# Altium PCB Kasli_BP_Adapter.PCBDOC (part 3 of 3)
Units mm, origin at the board's own origin, x right, y up, seen from the top; angles counter-clockwise.
Board outline 52.2 x 100 mm, 4 copper layers (TopLayer, MP(G), MidLayer1, BottomLayer), stack 1.65 mm thick; 18 components, 82 nets, 256 pads, 42 vias.
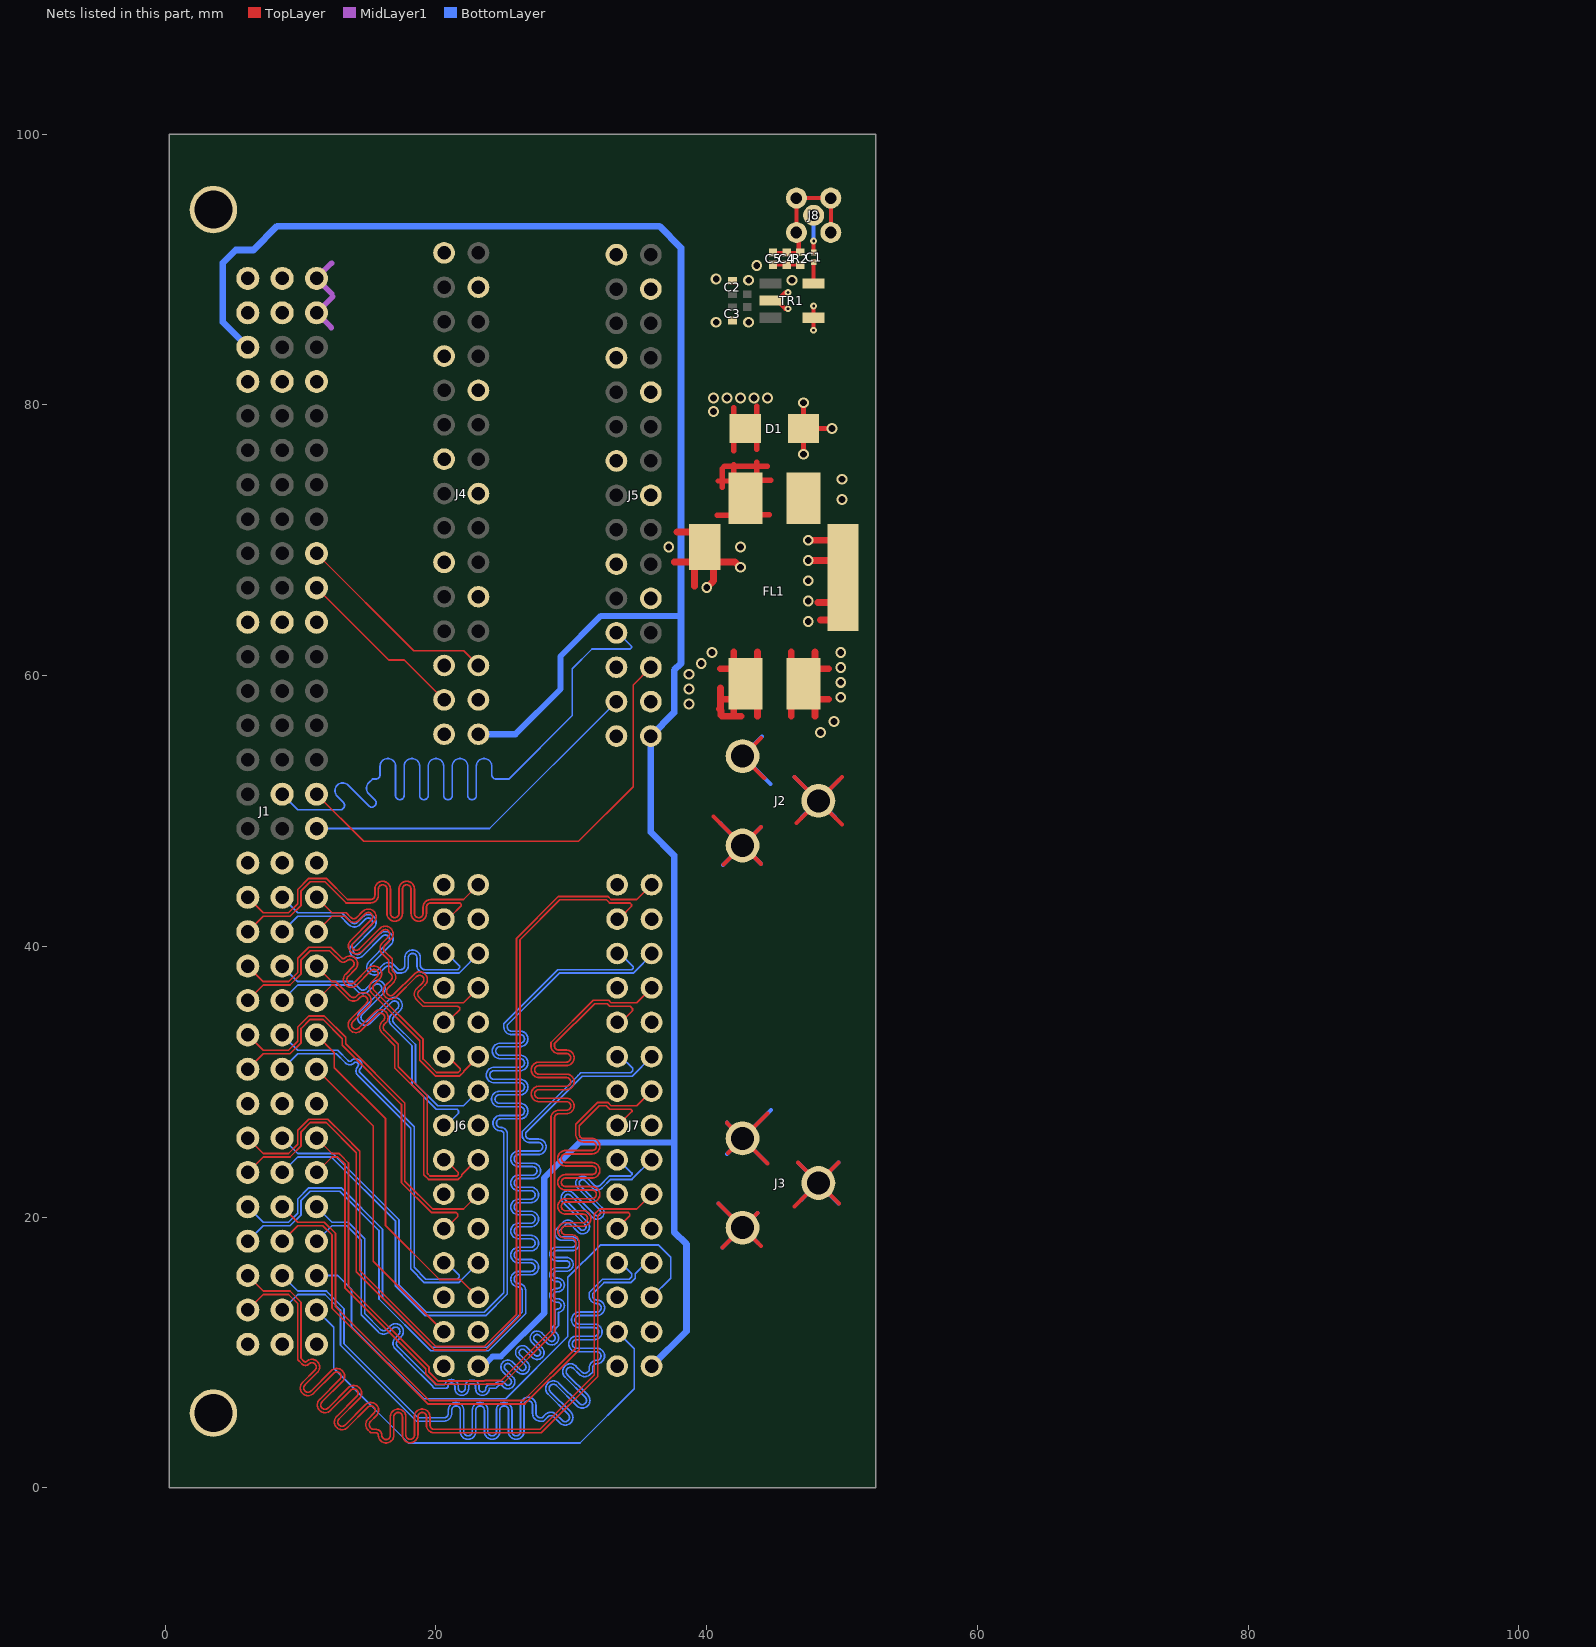
[diagram p4: the nets of this part, all layers, seen from the top]

## Via types
v1: diameter 0.8, hole 0.5, TopLayer to BottomLayer, tented both sides, 37 vias
v2: diameter 0.5, hole 0.2, TopLayer to BottomLayer, tented both sides, 5 vias

## Nets (pads, with @x,y where several pads share a name; then routed paths per layer and width w, separated by ;. In a path a pad name is that pad's centre, name@x,y a point inside that pad or via, vN(x,y) a via of type N, cw(c..) or ccw(c..) an arc to the next point about the centre after c; other vN are vias at no path point) (continued)
EXT9.LVDS_7_P: J1.b17 J5.23 | length 63.3
  BottomLayer w0.127: J1.b17@8.64,51.24 9.783,50.097 13.056,50.097 13.153,50.194 ccw(c12.929,50.419) 13.246,50.419 ccw(c12.929,50.419) 13.153,50.643 12.704,51.093 cw(c13.108,51.497) 12.704,51.901 cw(c13.108,51.497) 13.512,51.901 15.039,50.374 ccw(c15.263,50.599) 15.488,50.374 ccw(c15.263,50.599) 15.581,50.599 ccw(c15.263,50.599) 15.488,50.823 15.039,51.272 cw(c15.443,51.676) 15.039,52.08 15.313,52.354 15.556,52.354 ccw(c15.556,52.671) 15.873,52.671 15.873,53.306 cw(c16.445,53.306) 17.016,53.306 17.016,51.147 ccw(c17.334,51.147) 17.651,51.147 17.651,53.306 cw(c18.223,53.306) 18.794,53.306 18.794,51.147 ccw(c19.112,51.147) 19.429,51.147 19.429,53.306 cw(c20.001,53.306) 20.572,53.306 20.572,51.147 ccw(c20.89,51.147) 21.207,51.147 21.207,53.306 cw(c21.779,53.306) 22.35,53.306 22.35,51.147 ccw(c22.668,51.147) 22.985,51.147 22.985,53.306 cw(c23.557,53.306) 24.128,53.306 24.128,52.671 ccw(c24.446,52.671) 24.446,52.354 25.379,52.354 30.074,57.048 30.074,60.506 31.528,61.961 34.354,61.961 34.45,62.058 34.45,62.175 J5.23@33.47,63.155
EXT10.LVDS_0_N: J1.a13 J6.3 | length 28.7
  TopLayer w0.127: J1.a13@6.1,41.08 7.243,42.223 9.217,42.223 10.038,43.043 10.038,44.093 10.707,44.762 11.804,44.762 13.362,43.204 15.175,43.204 ccw(c15.175,43.775) 15.746,43.775 15.746,44.23 cw(c16.064,44.23) 16.381,44.23 16.381,42.432 ccw(c16.953,42.432) 17.524,42.432 17.524,44.23 cw(c17.842,44.23) 18.159,44.23 18.159,42.432 ccw(c18.731,42.432) 19.302,42.432 19.302,42.886 cw(c19.62,42.886) 19.62,43.204 21.771,43.204 21.875,43.1 21.875,43 J6.3@21.075,42.2
EXT10.LVDS_0_P: J1.a14 J6.2 | length 29.1
  TopLayer w0.127: J1.a14@6.1,43.62 7.243,42.477 9.112,42.477 9.784,43.149 9.784,44.198 10.602,45.016 11.909,45.016 13.467,43.458 15.175,43.458 ccw(c15.175,43.775) 15.492,43.775 15.492,44.23 cw(c16.064,44.23) 16.635,44.23 16.635,42.432 ccw(c16.953,42.432) 17.27,42.432 17.27,44.23 cw(c17.842,44.23) 18.413,44.23 18.413,42.432 ccw(c18.731,42.432) 19.048,42.432 19.048,42.886 cw(c19.62,42.886) 19.62,43.458 21.771,43.458 22.033,43.458 J6.2@23.125,44.55
EXT10.LVDS_1_N: J1.b13 J6.6 | length 29.2
  BottomLayer w0.127: J1.b13@8.64,41.08 9.783,42.223 12.946,42.223 13.572,41.597 ccw(c13.976,42.001) 14.38,41.597 14.781,41.997 cw(c15.005,41.773) 15.23,41.997 cw(c15.005,41.773) 15.323,41.773 cw(c15.005,41.773) 15.23,41.548 13.8,40.119 ccw(c14.204,39.715) 13.8,39.311 ccw(c14.204,39.715) 14.608,39.311 ; 14.608,39.31 16.038,40.74 cw(c16.262,40.516) 16.487,40.74 cw(c16.262,40.516) 16.58,40.516 cw(c16.262,40.516) 16.487,40.291 15.057,38.861 ; 15.057,38.862 ccw(c15.461,38.457) 15.057,38.053 ccw(c15.461,38.457) 15.866,38.053 ; 15.865,38.053 16.266,38.454 cw(c16.49,38.229) 16.715,38.454 17.145,38.024 17.388,38.024 ccw(c17.388,38.595) 17.96,38.595 17.96,39.162 cw(c18.277,39.162) 18.595,39.162 18.595,38.595 ccw(c19.166,38.595) 19.166,38.024 21.706,38.024 21.939,38.256 J6.6@23.125,39.443
EXT10.LVDS_1_P: J1.b14 J6.5 | length 28.9
  BottomLayer w0.127: J1.b14@8.64,43.62 9.783,42.477 13.051,42.477 13.752,41.777 ccw(c13.976,42.001) 14.201,41.777 14.601,42.177 cw(c15.005,41.773) 15.409,42.177 cw(c15.005,41.773) 15.577,41.773 cw(c15.005,41.773) 15.409,41.369 13.98,39.939 ccw(c14.204,39.715) 13.98,39.49 ccw(c14.204,39.715) 14.429,39.49 15.858,40.92 cw(c16.262,40.516) 16.666,40.92 cw(c16.262,40.516) 16.834,40.516 cw(c16.262,40.516) 16.666,40.112 15.237,38.682 ccw(c15.461,38.457) 15.237,38.233 ccw(c15.461,38.457) 15.686,38.233 16.086,38.633 cw(c16.49,38.229) 16.895,38.633 17.25,38.278 17.388,38.278 ccw(c17.388,38.595) 17.706,38.595 17.706,39.162 cw(c18.277,39.162) 18.849,39.162 18.849,38.595 ccw(c19.166,38.595) 19.166,38.278 21.601,38.278 21.759,38.436 21.759,38.541 20.83,39.47 J6.5@20.585,39.47
EXT10.LVDS_2_N: J1.c13 J6.9 | length 27.8
  TopLayer w0.127: J1.c13@11.18,41.08 12.323,42.223 13.259,42.223 13.529,41.953 ccw(c13.932,42.358) 14.337,41.953 14.786,42.402 cw(c15.01,42.178) 15.235,42.402 cw(c15.01,42.178) 15.328,42.178 cw(c15.01,42.178) 15.235,41.953 13.708,40.427 ccw(c14.112,40.023) 13.708,39.619 ccw(c14.112,40.023) 14.516,39.619 16.043,41.145 cw(c16.267,40.921) 16.492,41.145 cw(c16.267,40.921) 16.585,40.921 cw(c16.267,40.921) 16.492,40.696 16.043,40.247 ; 16.043,40.247 ccw(c16.447,39.843) 16.043,39.439 16.51,38.972 16.51,38.122 16.682,37.95 cw(c16.457,37.725) 16.775,37.725 cw(c16.457,37.725) 16.682,37.501 16.26,37.079 ccw(c16.665,36.675) 16.26,36.271 ccw(c16.665,36.675) 17.069,36.271 18.568,37.77 cw(c18.792,37.546) 19.017,37.77 cw(c18.792,37.546) 19.11,37.546 cw(c18.792,37.546) 19.017,37.321 18.568,36.872 ccw(c18.972,36.468) 18.568,36.064 19.048,35.584 21.616,35.584 21.75,35.45 21.75,35.325 J6.9@21.152,34.727
EXT10.LVDS_2_P: J1.c14 J6.8 | length 28.6
  TopLayer w0.127: J1.c14@11.18,43.62 12.323,42.477 13.364,42.477 13.708,42.133 ccw(c13.932,42.358) 14.157,42.133 14.606,42.582 cw(c15.01,42.178) 15.414,42.582 cw(c15.01,42.178) 15.582,42.178 cw(c15.01,42.178) 15.414,41.774 13.888,40.247 ccw(c14.112,40.023) 13.888,39.798 ccw(c14.112,40.023) 14.337,39.798 15.863,41.325 cw(c16.267,40.921) 16.671,41.325 cw(c16.267,40.921) 16.839,40.921 cw(c16.267,40.921) 16.671,40.517 16.222,40.068 ccw(c16.447,39.843) 16.222,39.619 16.764,39.077 16.764,38.227 16.862,38.129 cw(c16.457,37.725) 17.029,37.725 cw(c16.457,37.725) 16.862,37.321 16.44,36.9 ccw(c16.665,36.675) 16.44,36.451 ccw(c16.665,36.675) 16.889,36.451 18.388,37.95 cw(c18.792,37.546) 19.196,37.95 cw(c18.792,37.546) 19.364,37.546 cw(c18.792,37.546) 19.196,37.142 18.747,36.693 ccw(c18.972,36.468) 18.747,36.244 19.153,35.838 21.616,35.838 22.033,35.838 J6.8@23.125,36.93
EXT10.LVDS_3_N: J1.a11 J6.12 | length 29.2
  TopLayer w0.127: J1.a11@6.1,36 7.243,37.143 9.217,37.143 10.038,37.963 10.038,39.013 10.707,39.682 12.134,39.682 12.882,38.934 ccw(c13.15,39.201) 13.417,38.934 cw(c13.642,38.709) 13.866,38.934 cw(c13.642,38.709) 13.959,38.709 cw(c13.642,38.709) 13.866,38.485 13.33,37.949 ccw(c13.734,37.545) 13.33,37.141 ccw(c13.734,37.545) 14.138,37.141 ; 14.138,37.14 15.196,38.199 cw(c15.421,37.974) 15.645,38.199 cw(c15.421,37.974) 15.738,37.974 cw(c15.421,37.974) 15.645,37.75 15.26,37.364 ; 15.26,37.364 ccw(c15.664,36.96) 15.26,36.556 18.796,33.02 18.796,31.572 19.939,30.429 21.763,30.429 22.054,30.72 22.054,30.779 J6.12@23.125,31.85
EXT10.LVDS_3_P: J1.a12 J6.11 | length 28.7
  TopLayer w0.127: J1.a12@6.1,38.54 7.243,37.397 9.112,37.397 9.784,38.069 9.784,39.118 10.602,39.936 12.239,39.936 13.062,39.114 ccw(c13.15,39.201) 13.238,39.114 cw(c13.642,38.709) 14.046,39.114 cw(c13.642,38.709) 14.213,38.709 cw(c13.642,38.709) 14.046,38.305 13.51,37.769 ccw(c13.734,37.545) 13.51,37.32 ccw(c13.734,37.545) 13.959,37.32 15.017,38.378 cw(c15.421,37.974) 15.825,38.378 cw(c15.421,37.974) 15.992,37.974 cw(c15.421,37.974) 15.825,37.57 15.44,37.185 ccw(c15.664,36.96) 15.44,36.736 19.05,33.125 19.05,31.677 20.044,30.683 21.658,30.683 21.8,30.825 21.8,30.95 J6.11@20.9,31.85
EXT10.LVDS_4_N: J1.b11 J6.15 | length 28.3
  BottomLayer w0.127: J1.b11@8.64,36 9.783,37.143 13.733,37.143 14.201,36.675 ccw(c14.605,37.08) 15.009,36.676 15.458,37.125 cw(c15.682,36.9) 15.907,37.125 cw(c15.682,36.9) 16,36.9 cw(c15.682,36.9) 15.907,36.676 14.38,35.149 ccw(c14.784,34.745) 14.38,34.341 ccw(c14.784,34.745) 15.188,34.341 16.715,35.867 cw(c16.94,35.643) 17.164,35.867 cw(c16.94,35.643) 17.257,35.643 cw(c16.94,35.643) 17.164,35.418 16.715,34.969 ccw(c17.119,34.565) 16.715,34.161 18.237,32.639 18.237,29.754 20.027,27.964 21.564,27.964 21.67,27.858 21.67,27.67 20.77,26.77 J6.15@20.585,26.77
EXT10.LVDS_4_P: J1.b12 J6.14 | length 28.5
  BottomLayer w0.127: J1.b12@8.64,38.54 9.783,37.397 13.838,37.397 14.38,36.855 ccw(c14.605,37.08) 14.829,36.855 15.278,37.304 cw(c15.682,36.9) 16.086,37.304 cw(c15.682,36.9) 16.254,36.9 cw(c15.682,36.9) 16.086,36.496 14.56,34.969 ccw(c14.784,34.745) 14.56,34.52 ccw(c14.784,34.745) 15.009,34.52 16.536,36.047 ; 16.535,36.047 cw(c16.94,35.643) 17.344,36.047 cw(c16.94,35.643) 17.511,35.643 cw(c16.94,35.643) 17.344,35.239 16.895,34.79 ccw(c17.119,34.565) 16.895,34.341 18.491,32.744 18.491,29.859 20.133,28.218 21.564,28.218 22.033,28.218 ; 22.033,28.225 22.04,28.225 J6.14@23.125,29.31
EXT10.LVDS_5_N: J1.c11 J6.18 | length 29
  TopLayer w0.127: J1.c11@11.18,36 12.323,37.143 12.485,37.143 13.501,36.126 ccw(c13.906,36.531) 14.31,36.126 14.418,36.235 ; 14.418,36.235 cw(c14.642,36.01) 14.867,36.235 ; 14.867,36.234 cw(c14.642,36.01) 14.96,36.01 cw(c14.642,36.01) 14.867,35.786 13.681,34.6 ccw(c14.085,34.196) 13.681,33.792 ccw(c14.085,34.196) 14.489,33.792 15.675,34.977 cw(c15.899,34.752) 16.123,34.977 ; 16.124,34.977 cw(c15.899,34.752) 16.217,34.752 cw(c15.899,34.752) 16.124,34.528 16.016,34.42 ccw(c16.42,34.016) 16.016,33.612 16.967,32.661 16.967,31.01 19.101,28.876 19.101,23.136 19.454,22.782 21.654,22.782 21.904,23.032 21.904,23.138 22.996,24.23 J6.18@23.125,24.23
EXT10.LVDS_5_P: J1.c12 J6.17 | length 28.6
  TopLayer w0.127: J1.c12@11.18,38.54 12.323,37.397 12.59,37.397 13.681,36.306 ccw(c13.906,36.531) 14.13,36.306 14.238,36.414 cw(c14.642,36.01) 15.047,36.414 cw(c14.642,36.01) 15.214,36.01 cw(c14.642,36.01) 15.047,35.606 13.861,34.42 ccw(c14.085,34.196) 13.861,33.971 ccw(c14.085,34.196) 14.31,33.971 15.495,35.156 cw(c15.899,34.752) 16.303,35.156 cw(c15.899,34.752) 16.471,34.752 cw(c15.899,34.752) 16.303,34.348 16.196,34.241 ccw(c16.42,34.016) 16.196,33.792 17.221,32.766 17.221,31.115 19.355,28.981 19.355,23.241 19.56,23.036 21.549,23.036 21.65,23.138 21.65,23.294 20.714,24.23 J6.17@20.585,24.23
EXT10.LVDS_6_N: J1.a9 J6.21 | length 28.9
  TopLayer w0.127: J1.a9@6.1,30.92 7.243,32.063 9.217,32.063 10.038,32.883 10.038,33.933 10.707,34.602 11.653,34.602 13.081,33.174 13.081,32.686 17.45,28.317 17.45,22.55 19.656,20.344 21.487,20.344 21.619,20.212 21.619,20.044 20.725,19.15 J6.21@20.585,19.15
EXT10.LVDS_6_P: J1.a10 J6.20 | length 29.2
  TopLayer w0.127: J1.a10@6.1,33.46 7.243,32.317 9.112,32.317 9.784,32.989 9.784,34.038 10.602,34.856 11.758,34.856 13.335,33.279 13.335,32.791 17.704,28.423 17.704,22.655 19.761,20.598 21.487,20.598 22.033,20.598 J6.20@23.125,21.69
EXT10.LVDS_7_N: J1.b9 J6.24 | length 29.4
  BottomLayer w0.127: J1.b9@8.64,30.92 9.783,32.063 12.641,32.063 13.32,31.384 ccw(c13.635,31.698) 13.949,31.384 cw(c14.084,31.249) 14.218,31.384 cw(c14.084,31.249) 14.274,31.249 cw(c14.084,31.249) 14.218,31.114 ccw(c14.533,30.8) 14.218,30.486 18.136,26.568 18.136,16.176 19.15,15.162 21.677,15.162 21.979,15.464 ; 21.982,15.464 21.982,15.467 J6.24@23.125,16.61
EXT10.LVDS_7_P: J1.b10 J6.23 | length 28.9
  BottomLayer w0.127: J1.b10@8.64,33.46 9.783,32.317 12.746,32.317 13.5,31.563 ccw(c13.635,31.698) 13.769,31.563 cw(c14.084,31.249) 14.528,31.249 cw(c14.084,31.249) 14.398,30.935 ccw(c14.533,30.8) 14.398,30.665 18.39,26.674 18.39,16.281 19.255,15.416 21.571,15.416 21.725,15.57 21.725,15.7 J6.23@20.815,16.61
EXT11.LVDS_0_N: J1.a6 J7.3 | length 74.4
  TopLayer w0.127: J1.a6@6.1,23.3 7.243,24.443 9.217,24.443 10.038,25.263 10.038,26.313 10.707,26.982 11.905,26.982 14.122,24.765 14.122,15.951 19.863,10.211 19.89,10.184 23.683,10.184 26.213,12.714 26.213,40.488 29.159,43.434 32.597,43.434 32.827,43.204 34.339,43.204 34.448,43.095 34.448,42.952 J7.3@33.721,42.225 ; J7.3@33.385,42.01 J7.3@33.661,42.286
EXT11.LVDS_0_P: J1.a7 J7.2 | length 74.7
  TopLayer w0.127: J1.a7@6.1,25.84 7.243,24.697 9.112,24.697 9.784,25.369 9.784,26.418 10.602,27.236 12.011,27.236 13.184,26.062 14.376,24.87 14.376,16.056 19.995,10.438 23.577,10.438 25.959,12.819 25.959,40.593 29.054,43.688 32.703,43.688 32.933,43.458 34.339,43.458 34.833,43.458 J7.2@35.925,44.55
EXT11.LVDS_1_N: J1.b6 J7.6 | length 74.7
  BottomLayer w0.127: J1.b6@8.64,23.3 9.783,24.443 12.268,24.443 17.021,19.69 17.021,14.903 19.2,12.724 23.683,12.724 25.273,14.314 25.273,26.128 ccw(c24.78,26.128) 24.784,26.621 ; 24.782,26.621 cw(c24.782,26.939) 24.782,27.256 26.223,27.256 ccw(c26.223,27.828) 26.795,27.828 ccw(c26.223,27.828) 26.223,28.399 24.681,28.399 cw(c24.681,28.717) 24.681,29.034 26.223,29.034 ccw(c26.223,29.606) 26.795,29.606 ccw(c26.223,29.606) 26.223,30.177 24.295,30.177 cw(c24.295,30.495) 24.295,30.812 26.223,30.812 ccw(c26.223,31.384) 26.795,31.384 ccw(c26.223,31.384) 26.223,31.955 24.736,31.955 cw(c24.736,32.273) 24.736,32.59 26.223,32.59 ccw(c26.223,33.162) 26.795,33.162 ccw(c26.223,33.162) 26.223,33.733 25.59,33.733 cw(c25.59,34.051) 25.273,34.051 25.273,34.188 29.107,38.022 34.571,38.022 34.755,38.205 35.925,39.376 J7.6@35.925,39.47
EXT11.LVDS_1_P: J1.b7 J7.5 | length 74.2
  BottomLayer w0.127: J1.b7@8.64,25.84 9.783,24.697 12.373,24.697 17.275,19.795 17.275,15.008 19.305,12.978 23.577,12.978 25.019,14.42 25.019,26.128 ccw(c24.78,26.128) 24.78,26.367 ; 24.778,26.367 cw(c24.782,26.939) 24.782,27.51 26.223,27.51 ccw(c26.223,27.828) 26.541,27.828 ccw(c26.223,27.828) 26.223,28.145 24.681,28.145 cw(c24.681,28.717) 24.681,29.288 26.223,29.288 ccw(c26.223,29.606) 26.541,29.606 ccw(c26.223,29.606) 26.223,29.923 24.295,29.923 cw(c24.295,30.495) 24.295,31.066 26.223,31.066 ccw(c26.223,31.384) 26.541,31.384 ccw(c26.223,31.384) 26.223,31.701 24.736,31.701 cw(c24.736,32.273) 24.736,32.844 26.223,32.844 ccw(c26.223,33.162) 26.541,33.162 ccw(c26.223,33.162) 26.223,33.479 25.59,33.479 cw(c25.59,34.051) 25.019,34.051 25.019,34.294 29.002,38.276 34.466,38.276 34.575,38.385 34.575,38.5 J7.5@33.605,39.47
EXT11.LVDS_2_N: J1.c6 J7.9 | length 74.3
  TopLayer w0.127: J1.c6@11.18,23.3 12.323,24.443 12.739,24.443 13.288,23.894 13.288,14.754 13.362,14.679 19.239,8.803 19.239,8.432 20.027,7.644 23.683,7.644 23.709,7.671 24.921,7.671 28.753,11.503 28.753,27.32 cw(c29.07,27.32) 29.07,27.637 29.639,27.637 ccw(c29.639,28.209) 30.21,28.209 ccw(c29.639,28.209) 29.639,28.78 27.613,28.78 cw(c27.613,29.098) 27.613,29.415 29.639,29.415 ccw(c29.639,29.987) 30.21,29.987 ccw(c29.639,29.987) 29.639,30.558 27.613,30.558 cw(c27.613,30.876) 27.613,31.193 29.639,31.193 ccw(c29.639,31.765) 30.21,31.765 ccw(c29.639,31.765) 29.639,32.336 29.07,32.336 cw(c29.07,32.654) 28.753,32.654 28.753,32.791 31.725,35.763 32.648,35.763 32.827,35.584 34.341,35.584 34.525,35.4 34.525,35.25 J7.9@33.665,34.39
EXT11.LVDS_2_P: J1.c7 J7.8 | length 74.7
  TopLayer w0.127: J1.c7@11.18,25.84 12.323,24.697 12.844,24.697 12.919,24.623 13.542,23.999 13.542,14.859 19.493,8.908 19.493,8.538 20.133,7.898 23.577,7.898 23.604,7.925 24.816,7.925 28.499,11.608 28.499,27.32 cw(c29.07,27.32) 29.07,27.891 29.639,27.891 ccw(c29.639,28.209) 29.956,28.209 ccw(c29.639,28.209) 29.639,28.526 27.613,28.526 cw(c27.613,29.098) 27.613,29.669 29.639,29.669 ccw(c29.639,29.987) 29.956,29.987 ccw(c29.639,29.987) 29.639,30.304 27.613,30.304 cw(c27.613,30.876) 27.613,31.447 29.639,31.447 ccw(c29.639,31.765) 29.956,31.765 ccw(c29.639,31.765) 29.639,32.082 29.07,32.082 cw(c29.07,32.654) 28.499,32.654 28.499,32.897 31.619,36.017 32.753,36.017 32.933,35.838 34.341,35.838 34.833,35.838 J7.8@35.925,36.93
EXT11.LVDS_3_N: J1.a4 J7.12 | length 74.7
  BottomLayer w0.127: J1.a4@6.1,18.22 7.243,19.363 9.217,19.363 10.038,20.183 10.038,21.233 10.707,21.902 12.896,21.902 15.796,19.002 15.796,13.944 19.531,10.209 19.605,10.135 23.88,10.135 26.625,12.88 26.625,14.567 ccw(c26.096,14.567) 26.105,15.095 ; 26.101,15.095 cw(c26.101,15.413) 26.101,15.73 27.011,15.73 ccw(c27.011,16.302) 27.582,16.302 ccw(c27.011,16.302) 27.011,16.873 26.101,16.873 cw(c26.101,17.191) 26.101,17.508 27.011,17.508 ccw(c27.011,18.08) 27.582,18.08 ccw(c27.011,18.08) 27.011,18.651 26.101,18.651 cw(c26.101,18.969) 26.101,19.286 27.011,19.286 ccw(c27.011,19.858) 27.582,19.858 ccw(c27.011,19.858) 27.011,20.429 26.101,20.429 cw(c26.101,20.747) 26.101,21.064 27.011,21.064 ccw(c27.011,21.636) 27.582,21.636 ccw(c27.011,21.636) 27.011,22.207 26.101,22.207 cw(c26.101,22.525) 26.101,22.842 27.155,22.842 ccw(c27.155,23.414) 27.727,23.414 ccw(c27.155,23.414) 27.155,23.985 26.101,23.985 cw(c26.101,24.303) 26.101,24.62 27.573,24.62 ccw(c27.573,25.192) 28.145,25.192 ccw(c27.573,25.192) 27.573,25.763 26.942,25.763 cw(c26.942,26.081) 26.625,26.081 26.625,26.219 30.809,30.402 34.495,30.402 35.925,31.832 J7.12@35.925,31.85
EXT11.LVDS_3_P: J1.a5 J7.11 | length 74.1
  BottomLayer w0.127: J1.a5@6.1,20.76 7.243,19.617 9.112,19.617 9.784,20.289 9.784,21.338 10.602,22.156 13.001,22.156 16.05,19.107 16.05,14.049 19.71,10.389 23.774,10.389 26.371,12.985 26.371,14.567 ccw(c26.096,14.567) 26.096,14.841 ; 26.093,14.841 cw(c26.101,15.413) 26.101,15.984 27.011,15.984 ccw(c27.011,16.302) 27.328,16.302 ccw(c27.011,16.302) 27.011,16.619 26.101,16.619 cw(c26.101,17.191) 26.101,17.762 27.011,17.762 ccw(c27.011,18.08) 27.328,18.08 ccw(c27.011,18.08) 27.011,18.397 26.101,18.397 cw(c26.101,18.969) 26.101,19.54 27.011,19.54 ccw(c27.011,19.858) 27.328,19.858 ccw(c27.011,19.858) 27.011,20.175 26.101,20.175 cw(c26.101,20.747) 26.101,21.318 27.011,21.318 ccw(c27.011,21.636) 27.328,21.636 ccw(c27.011,21.636) 27.011,21.953 26.101,21.953 cw(c26.101,22.525) 26.101,23.096 27.155,23.096 ccw(c27.155,23.414) 27.473,23.414 ccw(c27.155,23.414) 27.155,23.731 26.101,23.731 cw(c26.101,24.303) 26.101,24.874 27.573,24.874 ccw(c27.573,25.192) 27.891,25.192 ccw(c27.573,25.192) 27.573,25.509 26.942,25.509 cw(c26.942,26.081) 26.371,26.081 26.371,26.324 30.502,30.455 30.703,30.656 34.39,30.656 34.534,30.8 34.534,30.991 J7.11@33.675,31.85
EXT11.LVDS_4_N: J1.b4 J7.15 | length 73.4
  TopLayer w0.127: J1.b4@8.64,18.22 9.783,19.363 11.652,19.363 12.322,18.693 12.322,13.277 19.402,6.198 26.572,6.198 30.582,10.207 30.582,18.124 ccw(c30.01,18.124) 30.01,18.695 29.576,18.695 cw(c29.576,19.013) 29.576,19.33 30.876,19.33 ccw(c30.876,19.902) 31.447,19.902 ccw(c30.876,19.902) 30.876,20.473 29.576,20.473 cw(c29.576,20.791) 29.576,21.108 31.534,21.108 ccw(c31.534,21.68) 32.106,21.68 ccw(c31.534,21.68) 31.534,22.251 29.576,22.251 cw(c29.576,22.569) 29.576,22.886 31.534,22.886 ccw(c31.534,23.458) 32.106,23.458 ccw(c31.534,23.458) 31.534,24.029 29.576,24.029 cw(c29.576,24.347) 29.576,24.664 31.534,24.664 ccw(c31.534,25.236) 32.106,25.236 ccw(c31.534,25.236) 31.534,25.807 30.899,25.807 cw(c30.899,26.125) 30.582,26.125 30.582,26.746 32.053,28.218 32.573,28.218 32.827,27.964 34.386,27.964 34.475,27.875 34.475,27.8 J7.15@33.445,26.77
EXT11.LVDS_4_P: J1.b5 J7.14 | length 73.8
  TopLayer w0.127: J1.b5@8.64,20.76 9.783,19.617 11.757,19.617 12.576,18.798 12.576,13.383 19.507,6.452 26.467,6.452 30.328,10.312 30.328,18.124 ccw(c30.01,18.124) 30.01,18.441 29.576,18.441 cw(c29.576,19.013) 29.576,19.584 30.876,19.584 ccw(c30.876,19.902) 31.193,19.902 ccw(c30.876,19.902) 30.876,20.219 29.576,20.219 cw(c29.576,20.791) 29.576,21.362 31.534,21.362 ccw(c31.534,21.68) 31.852,21.68 ccw(c31.534,21.68) 31.534,21.997 29.576,21.997 cw(c29.576,22.569) 29.576,23.14 31.534,23.14 ccw(c31.534,23.458) 31.852,23.458 ccw(c31.534,23.458) 31.534,23.775 29.576,23.775 cw(c29.576,24.347) 29.576,24.918 31.534,24.918 ccw(c31.534,25.236) 31.852,25.236 ccw(c31.534,25.236) 31.534,25.553 30.899,25.553 cw(c30.899,26.125) 30.328,26.125 30.328,26.851 31.948,28.472 32.679,28.472 32.933,28.218 34.386,28.218 34.833,28.218 J7.14@35.925,29.31
EXT11.LVDS_5_N: J1.c4 J7.18 | length 74.1
  BottomLayer w0.127: J1.c4@11.18,18.22 12.323,19.363 13.411,19.363 14.478,18.296 14.478,12.773 15.73,11.52 ccw(c16.134,11.925) 16.538,11.52 16.797,11.779 cw(c17.021,11.554) 17.245,11.779 ; 17.246,11.778 cw(c17.021,11.554) 17.339,11.554 cw(c17.021,11.554) 17.246,11.33 16.987,11.071 ccw(c17.392,10.667) 16.987,10.263 18.025,9.225 19.641,7.61 19.885,7.366 20.766,7.366 ccw(c20.766,7.493) 20.893,7.493 cw(c21.146,7.493) 21.146,7.746 ; 21.149,7.746 cw(c21.149,7.493) 21.401,7.493 21.401,7.339 ccw(c21.909,7.339) 22.417,7.339 22.417,7.493 cw(c22.622,7.493) 22.622,7.698 22.721,7.698 cw(c22.721,7.493) 22.925,7.493 22.925,7.339 ccw(c23.433,7.339) 23.941,7.339 cw(c23.969,7.339) 23.969,7.366 24.438,7.366 24.513,7.44 24.648,7.575 cw(c24.755,7.468) 24.862,7.575 24.965,7.472 ccw(c25.324,7.831) 25.832,7.831 ccw(c25.324,7.831) 25.683,8.191 25.125,8.749 cw(c25.304,8.929) 25.124,9.108 cw(c25.304,8.929) 25.484,9.108 26.043,8.55 ccw(c26.402,8.909) 26.91,8.909 ccw(c26.402,8.909) 26.761,9.268 26.216,9.813 cw(c26.396,9.993) 26.216,10.172 ; 26.216,10.172 cw(c26.396,9.993) 26.575,10.172 27.12,9.628 ccw(c27.479,9.987) 27.987,9.987 ccw(c27.479,9.987) 27.839,10.346 27.294,10.891 cw(c27.473,11.07) 27.293,11.249 cw(c27.473,11.07) 27.653,11.25 28.198,10.705 ccw(c28.557,11.064) 29.065,11.064 ccw(c28.557,11.064) 28.916,11.424 28.886,11.454 cw(c29.065,11.634) 28.886,11.813 29.058,11.985 29.058,12.958 ccw(c28.983,13.461) 29.491,13.461 ccw(c28.983,13.461) 28.983,13.969 28.921,13.969 cw(c28.921,14.223) 28.921,14.477 28.983,14.477 ccw(c28.983,14.985) 29.491,14.985 ccw(c28.983,14.985) 28.983,15.493 28.921,15.493 cw(c28.921,15.747) 28.921,16.001 29.633,16.001 ccw(c29.633,16.509) 30.141,16.509 ccw(c29.633,16.509) 29.633,17.017 28.921,17.017 cw(c28.921,17.271) 28.921,17.525 30.074,17.525 ccw(c30.074,18.033) 30.582,18.033 ccw(c30.074,18.033) 30.074,18.541 29.312,18.541 cw(c29.312,18.795) 29.058,18.795 29.058,18.933 29.577,19.452 cw(c29.756,19.272) 29.936,19.452 30.475,18.913 ccw(c30.834,19.272) 31.342,19.272 ccw(c30.834,19.272) 31.193,19.631 29.577,21.248 cw(c29.756,21.427) 29.576,21.607 ; 29.577,21.607 cw(c29.756,21.427) 29.936,21.607 31.552,19.991 ccw(c31.912,20.35) 32.42,20.35 ccw(c31.912,20.35) 32.271,20.709 30.654,22.325 cw(c30.834,22.505) 30.654,22.684 cw(c30.834,22.505) 31.014,22.685 31.552,22.146 ccw(c31.912,22.505) 32.271,22.146 32.907,22.782 34.477,22.782 J7.18@35.925,24.23
EXT11.LVDS_5_P: J1.c5 J7.17 | length 73.5
  BottomLayer w0.127: J1.c5@11.18,20.76 12.323,19.617 13.516,19.617 14.732,18.401 14.732,12.878 15.91,11.7 ccw(c16.134,11.925) 16.359,11.7 16.617,11.958 cw(c17.021,11.554) 17.425,11.958 cw(c17.021,11.554) 17.593,11.554 cw(c17.021,11.554) 17.425,11.15 17.167,10.892 ccw(c17.392,10.667) 17.167,10.443 18.205,9.405 19.821,7.789 19.906,7.704 19.99,7.62 20.655,7.62 cw(c21.146,7.493) 21.146,8 ; 21.149,8 cw(c21.149,7.493) 21.655,7.493 21.655,7.339 ccw(c21.909,7.339) 22.163,7.339 22.163,7.493 cw(c22.622,7.493) 22.622,7.952 22.721,7.952 cw(c22.721,7.493) 23.179,7.493 23.179,7.339 ccw(c23.433,7.339) 23.687,7.339 cw(c23.969,7.339) 23.969,7.62 24.333,7.62 24.468,7.755 cw(c24.755,7.468) 25.042,7.755 25.145,7.652 ccw(c25.324,7.831) 25.503,7.651 ; 25.504,7.652 ccw(c25.324,7.831) 25.578,7.831 ccw(c25.324,7.831) 25.504,8.011 24.945,8.57 cw(c25.304,8.929) 25.664,9.288 26.222,8.729 ccw(c26.402,8.909) 26.581,8.729 ; 26.581,8.729 ccw(c26.402,8.909) 26.656,8.909 ccw(c26.402,8.909) 26.581,9.089 26.037,9.633 cw(c26.396,9.993) 26.755,10.352 27.3,9.807 ccw(c27.479,9.987) 27.659,9.807 ; 27.659,9.807 ccw(c27.479,9.987) 27.733,9.987 ccw(c27.479,9.987) 27.659,10.166 27.114,10.711 cw(c27.473,11.07) 27.833,11.43 28.377,10.885 ccw(c28.557,11.064) 28.736,10.884 ; 28.737,10.885 ccw(c28.557,11.064) 28.811,11.064 ccw(c28.557,11.064) 28.737,11.244 28.706,11.274 cw(c29.065,11.634) 28.706,11.993 28.804,12.09 28.804,13.027 cw(c28.983,13.027) 28.983,13.207 ccw(c28.983,13.461) 29.237,13.461 ccw(c28.983,13.461) 28.983,13.715 28.921,13.715 cw(c28.921,14.223) 28.921,14.731 28.983,14.731 ccw(c28.983,14.985) 29.237,14.985 ccw(c28.983,14.985) 28.983,15.239 28.921,15.239 cw(c28.921,15.747) 28.921,16.255 29.633,16.255 ccw(c29.633,16.509) 29.887,16.509 ccw(c29.633,16.509) 29.633,16.763 28.921,16.763 cw(c28.921,17.271) 28.921,17.779 30.074,17.779 ccw(c30.074,18.033) 30.328,18.033 ccw(c30.074,18.033) 30.074,18.287 29.312,18.287 cw(c29.312,18.795) 28.804,18.795 28.804,19.038 29.397,19.631 cw(c29.756,19.272) 30.116,19.631 30.654,19.093 ccw(c30.834,19.272) 31.013,19.092 ccw(c30.834,19.272) 31.088,19.272 ccw(c30.834,19.272) 31.014,19.452 29.397,21.068 cw(c29.756,21.427) 30.116,21.787 31.732,20.17 ccw(c31.912,20.35) 32.091,20.17 ; 32.091,20.17 ccw(c31.912,20.35) 32.166,20.35 ccw(c31.912,20.35) 32.091,20.529 30.475,22.146 cw(c30.834,22.505) 31.193,22.864 31.732,22.325 ccw(c31.912,22.505) 32.091,22.325 32.802,23.036 34.372,23.036 34.475,23.139 34.475,23.25 J7.17@33.495,24.23
EXT11.LVDS_6_N: J1.a2 J7.21 | length 74.1
  TopLayer w0.127: J1.a2@6.1,13.14 7.243,14.283 9.112,14.283 9.782,13.613 9.782,9.467 10.104,9.146 ccw(c10.358,9.4) 10.612,9.146 cw(c10.837,8.921) 11.154,8.921 cw(c10.837,8.921) 11.061,8.697 10.148,7.783 ccw(c10.552,7.379) 10.956,6.975 12.454,8.473 cw(c12.679,8.249) 12.996,8.249 cw(c12.679,8.249) 12.903,8.024 11.405,6.526 ; 11.405,6.526 ccw(c11.809,6.122) 12.213,5.718 13.711,7.216 cw(c13.936,6.991) 14.253,6.991 cw(c13.936,6.991) 14.16,6.767 12.662,5.269 ; 12.662,5.269 ccw(c13.066,4.865) 13.471,4.461 14.969,5.959 cw(c15.193,5.734) 15.511,5.734 cw(c15.193,5.734) 15.418,5.51 14.983,5.075 ccw(c15.387,4.671) 14.983,4.267 ; 14.983,4.267 15.186,4.064 15.566,4.064 cw(c15.566,3.884) 15.746,3.884 ccw(c16.318,3.884) 16.889,3.884 16.889,5.25 cw(c17.207,5.25) 17.524,5.25 17.524,3.904 ccw(c18.096,3.904) 18.667,3.904 18.667,5.25 cw(c18.985,5.25) 19.302,5.25 19.302,4.635 ccw(c19.874,4.635) 19.874,4.064 27.791,4.064 31.953,8.226 31.953,20.091 32.206,20.344 34.206,20.344 34.325,20.225 34.325,20.09 J7.21@33.385,19.15
EXT11.LVDS_6_P: J1.a3 J7.20 | length 74.7
  TopLayer w0.127: J1.a3@6.1,15.68 7.243,14.537 9.217,14.537 10.036,13.718 10.036,9.573 10.284,9.325 ccw(c10.358,9.4) 10.433,9.325 cw(c10.837,8.921) 11.408,8.921 cw(c10.837,8.921) 11.241,8.517 10.328,7.604 ccw(c10.552,7.379) 10.777,7.155 12.275,8.653 cw(c12.679,8.249) 13.25,8.249 cw(c12.679,8.249) 13.083,7.844 11.585,6.346 ccw(c11.809,6.122) 12.034,5.897 13.532,7.395 cw(c13.936,6.991) 14.507,6.991 cw(c13.936,6.991) 14.34,6.587 ; 14.34,6.587 12.842,5.089 ccw(c13.066,4.865) 13.291,4.64 14.789,6.138 cw(c15.193,5.734) 15.765,5.734 cw(c15.193,5.734) 15.597,5.33 15.163,4.895 ccw(c15.387,4.671) 15.163,4.446 15.291,4.318 15.566,4.318 cw(c15.566,3.884) 16,3.884 ccw(c16.318,3.884) 16.635,3.884 16.635,5.25 cw(c17.207,5.25) 17.778,5.25 17.778,3.904 ccw(c18.096,3.904) 18.413,3.904 18.413,5.25 cw(c18.985,5.25) 19.556,5.25 19.556,4.635 ccw(c19.874,4.635) 19.874,4.318 27.686,4.318 31.699,8.331 31.699,20.197 32.101,20.598 34.206,20.598 34.833,20.598 J7.20@35.925,21.69
EXT11.LVDS_7_N: J1.b2 J7.24 | length 74.7
  BottomLayer w0.127: J1.b2@8.64,13.14 9.783,14.283 11.803,14.283 12.954,13.132 12.954,10.537 18.566,4.925 20.595,4.925 ccw(c20.595,5.496) 21.166,5.496 21.166,5.736 cw(c21.484,5.736) 21.801,5.736 21.801,4.155 ccw(c22.373,4.155) 22.944,4.155 22.944,5.736 cw(c23.262,5.736) 23.579,5.736 23.579,4.155 ccw(c24.151,4.155) 24.722,4.155 24.722,5.736 cw(c25.04,5.736) 25.357,5.736 25.357,4.155 ccw(c25.929,4.155) 26.5,4.155 26.5,6.112 cw(c26.818,6.112) 27.135,6.112 27.135,5.496 ccw(c27.707,5.496) 27.707,4.925 27.95,4.925 28.26,5.235 cw(c28.485,5.011) 28.709,5.235 29.144,4.8 ccw(c29.548,5.204) 29.953,4.8 ccw(c29.548,5.204) 30.12,5.204 ccw(c29.548,5.204) 29.953,5.608 28.453,7.107 cw(c28.678,7.332) 28.453,7.556 cw(c28.678,7.332) 28.902,7.556 30.402,6.057 ccw(c30.806,6.461) 31.21,6.057 ccw(c30.806,6.461) 31.377,6.461 ccw(c30.806,6.461) 31.21,6.865 ; 31.21,6.865 29.711,8.364 cw(c29.935,8.589) 29.711,8.813 cw(c29.935,8.589) 30.16,8.813 30.595,8.378 ccw(c30.999,8.782) 31.403,8.378 31.575,8.55 31.575,8.853 cw(c31.892,8.853) 31.892,9.171 ; 31.902,9.171 ccw(c31.882,9.742) 32.453,9.742 ccw(c31.882,9.742) 31.882,10.314 30.388,10.314 cw(c30.388,10.631) 30.388,10.949 31.702,10.949 ccw(c31.702,11.52) 32.274,11.52 ccw(c31.702,11.52) 31.702,12.092 30.586,12.092 cw(c30.586,12.409) 30.586,12.727 31.892,12.727 ccw(c31.892,13.298) 32.464,13.298 ccw(c31.892,13.298) 31.892,13.87 cw(c31.892,14.187) 31.575,14.187 31.575,14.325 32.412,15.162 34.396,15.162 34.722,15.488 34.722,15.824 35.508,16.61 J7.24@35.925,16.61
EXT11.LVDS_7_P: J1.b3 J7.23 | length 74.2
  BottomLayer w0.127: J1.b3@8.64,15.68 9.783,14.537 11.908,14.537 13.208,13.237 13.208,10.643 18.672,5.179 20.595,5.179 ccw(c20.595,5.496) 20.912,5.496 20.912,5.736 cw(c21.484,5.736) 22.055,5.736 22.055,4.155 ccw(c22.373,4.155) 22.69,4.155 22.69,5.736 cw(c23.262,5.736) 23.833,5.736 23.833,4.155 ccw(c24.151,4.155) 24.468,4.155 24.468,5.736 cw(c25.04,5.736) 25.611,5.736 25.611,4.155 ccw(c25.929,4.155) 26.246,4.155 26.246,6.112 cw(c26.818,6.112) 27.389,6.112 27.389,5.496 ccw(c27.707,5.496) 27.707,5.179 27.845,5.179 28.08,5.415 cw(c28.485,5.011) 28.889,5.415 ; 28.888,5.415 29.324,4.979 ccw(c29.548,5.204) 29.773,4.979 ccw(c29.548,5.204) 29.866,5.204 ccw(c29.548,5.204) 29.773,5.428 28.274,6.928 cw(c28.678,7.332) 28.274,7.736 cw(c28.678,7.332) 29.082,7.736 30.581,6.237 ccw(c30.806,6.461) 31.03,6.237 ccw(c30.806,6.461) 31.123,6.461 ccw(c30.806,6.461) 31.03,6.686 29.531,8.185 cw(c29.935,8.589) 29.531,8.993 cw(c29.935,8.589) 30.339,8.993 30.774,8.558 ccw(c30.999,8.782) 31.223,8.558 31.321,8.655 31.321,8.853 cw(c31.892,8.853) 31.872,9.424 ; 31.882,9.425 ccw(c31.882,9.742) 32.199,9.742 ccw(c31.882,9.742) 31.882,10.06 30.388,10.06 cw(c30.388,10.631) 30.388,11.203 31.702,11.203 ccw(c31.702,11.52) 32.02,11.52 ccw(c31.702,11.52) 31.702,11.838 30.586,11.838 cw(c30.586,12.409) 30.586,12.981 31.892,12.981 ccw(c31.892,13.298) 32.21,13.298 ccw(c31.892,13.298) 31.892,13.616 cw(c31.892,14.187) 31.321,14.187 31.321,14.43 32.307,15.416 34.291,15.416 34.468,15.593 34.468,15.824 33.682,16.61 J7.23@33.385,16.61
GND: C2.1 C3.2 C4.1 C5.1 D1.2 FL1.4 J1.a1 J1.a8 J1.a15 J1.a22 J1.a29 J1.b1 J1.b8 J1.b15 J1.b22 J1.b29 J1.c1 J1.c8 J1.c15 J1.c22 J1.c29 J1.MTG1 J1.MTG2 J4.1 J4.4 J4.7 J4.10 J4.13 J4.16 J4.19 J4.22 J4.25 J5.1 J5.4 J5.7 J5.10 J5.13 J5.16 J5.19 J5.22 J5.25 J6.1 J6.4 J6.7 J6.10 J6.13 J6.16 J6.19 J6.22 J6.25 J7.1 J7.4 J7.7 J7.10 J7.13 J7.16 J7.19 J7.22 J7.25 R2.1 TR1.2 TR1.6 | length 36.3
  TopLayer w0.2: C5.1@44.92,90.33 R2.1@46.9,90.33 ; FL1.4@50.058,64.258 50.058,65.442 FL1.4@50.058,67.243
  TopLayer w0.3: TR1.2@44.71,87.7 TR1.2@45.2,87.7 ; v2(46,87.1) 45.8,87.1 TR1.2@45.2,87.7 ; v2(46,88.3) 45.8,88.3 TR1.2@45.2,87.7 ; v2(47.89,85.51) TR1.6@47.89,86.43 47.9,86.44 v2(47.9,87.3)
  TopLayer w0.4: v1(47.15,76.35) D1.2@47.15,78.25 ; v1(47.15,80.15) D1.2@47.15,78.25 ; v1(49.25,78.25) D1.2@47.15,78.25
  TopLayer w0.5: 37.6,68.4 39,68.4 39,68.635 FL1.4@39.858,69.493 39.1,70.251 39.1,70.6 37.8,70.6 ; 39.1,66.6 FL1.4@39.1,68.4 ; FL1.4@39.9,68.4 FL1.4@40.5,68.4 ; v1(40,66.5) 40.5,67 FL1.4@40.5,68.4 ; v1(42.5,68) 42.1,68.4 FL1.4@40.5,68.4 ; v1(47.5,68.5) FL1.4@50.2,68.5 ; v1(47.5,70) FL1.4@50,70 ; 48.2,65.4 50.016,65.4 FL1.4@50.058,65.442 ; 48.4,64.1 49.9,64.1 FL1.4@50.058,64.258
  other v1: 47.5,64 47.5,65.5 47.5,67 37.2,69.5 42.5,69.5 50,73 50,74.5 40.7,86.1 43.1,86.1 43.1,89.2 46.3,89.2 40.7,89.3 43.7,90.3
I2C_SCL_8: J1.c23 J4.27 | length 12.8
  TopLayer w0.127: J1.c23@11.18,66.48 16.51,61.15 17.655,61.15 J4.27@20.6,58.205
I2C_SCL_9: J1.c16 J5.27 | length 26
  BottomLayer w0.127: J1.c16@11.18,48.7 23.96,48.7 J5.27@33.335,58.075
I2C_SCL_10: J1.c9 J6.27 | length 23.3
  TopLayer w0.127: J1.c9@11.18,30.92 15.367,26.733 15.367,16.748 J6.27@20.585,11.53
I2C_SCL_11: J1.c2 J7.27 | length 35.7
  BottomLayer w0.127: J1.c2@11.18,13.14 12.446,11.874 12.446,8.839 17.972,3.313 30.638,3.313 34.65,7.325 34.65,10.265 J7.27@33.385,11.53
I2C_SDA_8: J1.c24 J4.26 | length 15.4
  TopLayer w0.127: J1.c24@11.18,69.02 18.363,61.837 22.048,61.837 J4.26@23.14,60.745
I2C_SDA_9: J1.c17 J5.26 | length 35.9
  TopLayer w0.127: J1.c17@11.18,51.24 14.668,47.752 30.527,47.752 34.569,51.794 34.569,59.309 J5.26@35.875,60.615
I2C_SDA_10: J1.c10 J6.26 | length 25.2
  TopLayer w0.127: J1.c10@11.18,33.46 12.497,32.143 12.497,31.039 16.281,27.254 16.281,19.369 20.258,15.392 21.803,15.392 J6.26@23.125,14.07
I2C_SDA_11: J1.c3 J7.26 | length 42.7
  BottomLayer w0.127: J1.c3@11.18,15.68 12.743,15.68 13.767,14.656 13.767,11.913 19.101,6.579 25.146,6.579 29.743,11.176 29.743,15.545 32.131,17.932 36.449,17.932 37.338,17.043 37.338,15.483 J7.26@35.925,14.07
NetC1_1: C1.1 TR1.4 | length 1.6
  TopLayer w0.3: TR1.4@47.9,88.98 C1.1@47.9,90.55
NetC1_2: C1.2 J8.1 | length 2.7
  TopLayer w0.3: C1.2@47.9,91.25 v2(47.9,92.1)
  BottomLayer w0.3: v2(47.9,92.1) J8.1@47.9,94
NetC4_2: C4.2 C5.2 J8.2 R2.2 | length 11
  TopLayer w0.2: C5.2@44.9,91.25 C4.2@45.9,91.25 46.68,91.25 R2.2@46.8,91.37
  TopLayer w0.3: R2.2@46.8,91.37 46.8,92.56 J8.2@46.63,92.73 J8.2@46.63,95.27 J8.2@49.17,95.27 J8.2@49.17,92.73
NetFL1_1: FL1.1 J2.3 J3.3 | length 49.6
  TopLayer w0.3: 40.5,49.6 J2.3@42.65,47.45 ; 40.867,21 J3.3@42.65,19.217 ; 41.183,17.75 J3.3@42.65,19.217 ; 41.25,46.05 J2.3@42.65,47.45 ; 43.75,20.317 J3.3@42.65,19.217 ; 44,17.867 J3.3@42.65,19.217 ; 44,46.1 J2.3@42.65,47.45 ; 44,48.8 J2.3@42.65,47.45
  TopLayer w0.5: 41,58.25 41.025,58.25 ; 41,60.5 41.751,60.5 FL1.1@42,60.251 ; 41.025,59.075 41.025,58.25 ; 42,61.75 FL1.1@42,60.251 ; 42.55,57 42,57 ; 43.75,57 43.75,57.75 42.965,58.535 FL1.1@42,58.535 ; 43.75,61.75 43.75,60.285 FL1.1@42.858,59.393 ; 41.025,58.25 41.715,58.25 FL1.1@42,58.535 ; 41.025,58.25 41.025,57.6 40.95,57.525 41.05,57.425 41.05,57.075 41.125,57 42,57 ; 42,57 FL1.1@42,58.535 ; FL1.1@42,58.535 FL1.1@42.858,59.393 ; FL1.1@42,60.251 FL1.1@42.858,59.393
  BottomLayer w0.3: 40.867,21 J3.3@42.65,19.217 ; 41,49.1 J2.3@42.65,47.45 ; 41.183,17.75 J3.3@42.65,19.217 ; 41.2,46 J2.3@42.65,47.45 ; 43.75,18.117 J3.3@42.65,19.217 ; 43.75,20.317 J3.3@42.65,19.217 ; 44,46.1 J2.3@42.65,47.45 ; 44,48.8 J2.3@42.65,47.45
  other v1: 38.7,57.9 38.7,59 38.7,60.1 39.6,60.9 40.4,61.7
NetFL1_3: FL1.3 J2.1 J2.2 J3.1 J3.2 | length 76.1
  TopLayer w0.3: 41.5,26.967 J3.2@42.65,25.817 ; 41.581,24.748 J3.2@42.65,25.817 ; J2.2@42.7,54.05 J2.2@42.65,54.05 ; 44,55.4 J2.2@42.65,54.05 ; 44.25,52.45 J2.2@42.65,54.05 ; 44.5,23.967 J3.2@42.65,25.817 ; 44.5,27.667 J3.2@42.65,25.817 ; 46.5,20.767 J3.1@48.25,22.517 ; 46.5,52.5 J2.1@48.25,50.75 ; 46.625,49.125 J2.1@48.25,50.75 ; 46.75,24.017 J3.1@48.25,22.517 ; 49.75,24.017 J3.1@48.25,22.517 ; 49.767,21 J3.1@48.25,22.517 ; 50,49 J2.1@48.25,50.75 ; 50,52.5 J2.1@48.25,50.75
  TopLayer w0.5: 46.25,57 46.25,58.485 FL1.3@47.158,59.393 ; 46.25,61.75 46.25,60.301 FL1.3@47.158,59.393 ; 48,57 FL1.3@48,58.551 ; 48,61.75 FL1.3@48,60.235 ; 49,58.25 48.301,58.25 FL1.3@48,58.551 ; 49,60.5 48.265,60.5 FL1.3@48,60.235 ; FL1.3@47.158,59.393 FL1.3@48,60.235 ; FL1.3@47.158,59.393 FL1.3@48,58.551 ; FL1.3@48,58.551 FL1.3@48,60.235
  BottomLayer w0.3: 41.5,24.667 J3.2@42.65,25.817 ; 41.5,26.967 J3.2@42.65,25.817 ; 44.1,55.5 J2.2@42.65,54.05 44.7,52 ; 44.467,24 J3.2@42.65,25.817 ; 44.75,27.917 J3.2@42.65,25.817 ; 46.5,52.5 J2.1@48.25,50.75 ; 46.767,24 J3.1@48.25,22.517 ; 46.983,21.25 J3.1@48.25,22.517 ; 47,49.5 J2.1@48.25,50.75 ; 49.5,49.5 J2.1@48.25,50.75 ; 49.75,21.017 J3.1@48.25,22.517 ; 49.75,24.017 J3.1@48.25,22.517 ; 49.75,52.25 J2.1@48.25,50.75
  other v1: 48.4,55.8 49.4,56.6 49.9,58.4 49.9,59.5 49.9,60.6 49.9,61.7
P3V3: J1.a30 J4.30 J5.30 J6.30 J7.30 | length 175.2
  BottomLayer w0.45: J4.30@23.14,55.665 25.865,55.665 29.2,59 29.2,61.417 32.191,64.409 37.891,64.409 38.1,64.2 ; J6.30@23.49,8.99 24.2,9.7 24.8,9.7 28,12.9 28,22.9 30.6,25.5 37.6,25.5
  BottomLayer w0.5: J1.a30@6.1,84.26 4.25,86.11 4.25,90.482 5.214,91.446 6.521,91.446 8.275,93.2 36.5,93.2 38.1,91.6 38.1,64.2 38.1,60.9 37.6,60.4 37.6,57.26 J5.30@35.875,55.535 35.875,48.425 37.6,46.7 37.6,25.5 37.6,18.9 38.5,18 38.5,11.565 J7.30@35.925,8.99
P12V0: D1.1 FL1.2 J1.a31 J1.a32 J1.b31 J1.b32 J1.c31 J1.c32 J4.28 J4.29 J5.28 J5.29 J6.28 J6.29 J7.28 J7.29 | length 34
  TopLayer w0.4: 40.775,71.85 42.2,71.85 FL1.2@42.858,72.508 ; 40.85,74.375 41.15,74.375 ; 41.15,73.925 41.15,74.375 ; 42,75.575 42,75.475 ; 42,76.6 42,79.8 ; FL1.2@42.05,71.5 42.858,72.308 FL1.2@42.858,72.508 ; 43.7,75.775 43.7,75.475 ; 43.7,76.7 43.7,79.9 ; 44.475,75.475 43.7,75.475 ; 44.625,71.875 43.825,71.875 43.825,72.126 FL1.2@42.858,73.093 ; 44.725,74.425 43.725,74.425 FL1.2@43.7,74.4 ; 41.15,74.375 FL1.2@42,74.375 ; 41.15,74.375 41.15,75.3 41.325,75.475 42,75.475 ; FL1.2@42,74.375 42,73.951 FL1.2@42.858,73.093 ; FL1.2@42,74.375 42,75.475 ; 42,75.475 43.7,75.475 ; FL1.2@42.858,72.508 FL1.2@42.858,73.093 ; FL1.2@42.858,73.093 42.858,73.558 FL1.2@43.7,74.4 ; FL1.2@42.858,73.093 43.7,73.935 FL1.2@43.7,74.4 ; FL1.2@43.7,74.4 43.7,75.475
  MidLayer1 w0.4: 12.28,85.7 J1.c31@11.18,86.8 12.38,88 ; 12.3,90.46 J1.c32@11.18,89.34 12.32,88.2
  other v1: 40.5,79.5 40.5,80.5 41.5,80.5 42.5,80.5 43.5,80.5 44.5,80.5
copper on no net: | length 2619.8
  TopLayer w0.025: 69.445,78.486 70.453,77.478 ; 69.445,80.01 71.977,77.478 ; 69.445,81.534 72.493,78.486 73.501,77.478 ; 69.445,83.058 72.493,80.01 75.025,77.478 ; 69.445,84.582 72.493,81.534 75.541,78.486 76.549,77.478 ; 69.445,86.106 72.493,83.058 75.541,80.01 78.073,77.478 ; 69.445,87.63 72.493,84.582 75.541,81.534 78.589,78.486 79.597,77.478 ; 69.445,89.154 72.493,86.106 75.541,83.058 78.589,80.01 81.121,77.478 ; 69.445,90.678 72.493,87.63 75.541,84.582 78.589,81.534 81.637,78.486 82.645,77.478 ; 69.445,92.202 72.493,89.154 75.541,86.106 78.589,83.058 81.637,80.01 84.169,77.478 ; 69.445,93.726 72.493,90.678 75.541,87.63 78.589,84.582 81.637,81.534 84.685,78.486 85.693,77.478 ; 69.445,95.25 72.493,92.202 75.541,89.154 78.589,86.106 81.637,83.058 84.685,80.01 87.217,77.478 ; 69.445,96.774 72.493,93.726 75.541,90.678 78.589,87.63 81.637,84.582 84.685,81.534 87.733,78.486 88.741,77.478 ; 69.445,98.298 72.493,95.25 75.541,92.202 78.589,89.154 81.637,86.106 84.685,83.058 87.733,80.01 90.265,77.478 ; 69.445,99.822 72.493,96.774 75.541,93.726 78.589,90.678 81.637,87.63 84.685,84.582 87.733,81.534 90.781,78.486 91.789,77.478 ; 69.445,101.346 72.493,98.298 75.541,95.25 78.589,92.202 81.637,89.154 84.685,86.106 87.733,83.058 90.781,80.01 93.313,77.478 ; 69.445,102.87 72.493,99.822 75.541,96.774 78.589,93.726 81.637,90.678 84.685,87.63 87.733,84.582 90.781,81.534 93.829,78.486 94.837,77.478 ; 69.445,104.394 72.493,101.346 75.541,98.298 78.589,95.25 81.637,92.202 84.685,89.154 87.733,86.106 90.781,83.058 93.829,80.01 96.361,77.478 ; 69.445,105.918 72.493,102.87 75.541,99.822 78.589,96.774 81.637,93.726 84.685,90.678 87.733,87.63 90.781,84.582 93.829,81.534 96.877,78.486 97.885,77.478 ; 70.969,105.918 72.493,104.394 75.541,101.346 78.589,98.298 81.637,95.25 84.685,92.202 87.733,89.154 90.781,86.106 93.829,83.058 96.877,80.01 99.409,77.478 ; 72.493,105.918 75.541,102.87 78.589,99.822 81.637,96.774 84.685,93.726 87.733,90.678 90.781,87.63 93.829,84.582 96.877,81.534 99.925,78.486 100.933,77.478 ; 74.017,105.918 75.541,104.394 78.589,101.346 81.637,98.298 84.685,95.25 87.733,92.202 90.781,89.154 93.829,86.106 96.877,83.058 99.925,80.01 102.457,77.478 ; 75.541,105.918 78.589,102.87 81.637,99.822 84.685,96.774 87.733,93.726 90.781,90.678 93.829,87.63 96.877,84.582 99.925,81.534 102.973,78.486 ; 77.065,105.918 78.589,104.394 81.637,101.346 84.685,98.298 87.733,95.25 90.781,92.202 93.829,89.154 96.877,86.106 99.925,83.058 102.973,80.01 ; 78.589,105.918 81.637,102.87 84.685,99.822 87.733,96.774 90.781,93.726 93.829,90.678 96.877,87.63 99.925,84.582 102.973,81.534 ; 80.113,105.918 81.637,104.394 84.685,101.346 87.733,98.298 90.781,95.25 93.829,92.202 96.877,89.154 99.925,86.106 102.973,83.058 ; 81.637,105.918 84.685,102.87 87.733,99.822 90.781,96.774 93.829,93.726 96.877,90.678 99.925,87.63 102.973,84.582 ; 83.161,105.918 84.685,104.394 87.733,101.346 90.781,98.298 93.829,95.25 96.877,92.202 99.925,89.154 102.973,86.106 ; 84.685,105.918 87.733,102.87 90.781,99.822 93.829,96.774 96.877,93.726 99.925,90.678 102.973,87.63 ; 86.209,105.918 87.733,104.394 90.781,101.346 93.829,98.298 96.877,95.25 99.925,92.202 102.973,89.154 ; 87.733,105.918 90.781,102.87 93.829,99.822 96.877,96.774 99.925,93.726 102.973,90.678 ; 89.257,105.918 90.781,104.394 93.829,101.346 96.877,98.298 99.925,95.25 102.973,92.202 ; 90.781,105.918 93.829,102.87 96.877,99.822 99.925,96.774 102.973,93.726 ; 92.305,105.918 93.829,104.394 96.877,101.346 99.925,98.298 102.973,95.25 ; 93.829,105.918 96.877,102.87 99.925,99.822 102.973,96.774 ; 95.353,105.918 96.877,104.394 99.925,101.346 102.973,98.298 ; 96.877,105.918 99.925,102.87 102.973,99.822 ; 98.401,105.918 99.925,104.394 102.973,101.346 ; 99.925,105.918 102.973,102.87 ; 101.449,105.918 102.973,104.394
  TopLayer w0.381: 66.397,2.567 102.973,2.567 ; 66.397,24.659 102.973,24.659 ; 66.397,46.497 102.973,46.497 ; 66.397,63.003 102.973,63.003 ; 66.397,77.478 102.973,77.478 ; 69.445,-7.845 69.445,105.918 ; 72.493,-7.845 72.493,2.567 72.493,24.659 72.493,46.497 72.493,63.003 72.493,77.478 72.493,105.918 ; 75.541,-7.845 75.541,2.567 75.541,24.659 75.541,46.497 75.541,63.003 75.541,77.478 75.541,105.918 ; 78.589,-7.845 78.589,2.567 78.589,24.659 78.589,46.497 78.589,63.003 78.589,77.478 78.589,105.918 ; 81.637,-7.845 81.637,2.567 81.637,24.659 81.637,46.497 81.637,63.003 81.637,77.478 81.637,105.918 ; 84.685,-7.845 84.685,2.567 84.685,24.659 84.685,46.497 84.685,63.003 84.685,77.478 84.685,105.918 ; 87.733,-7.845 87.733,2.567 87.733,24.659 87.733,46.497 87.733,63.003 87.733,77.478 87.733,105.918 ; 90.781,-7.845 90.781,2.567 90.781,24.659 90.781,46.497 90.781,63.003 90.781,77.478 90.781,105.918 ; 93.829,-7.845 93.829,2.567 93.829,24.659 93.829,46.497 93.829,63.003 93.829,77.478 93.829,105.918 ; 96.877,-7.845 96.877,2.567 96.877,24.659 96.877,46.497 96.877,63.003 96.877,77.478 96.877,105.918 ; 99.925,-7.845 99.925,2.567 99.925,24.659 99.925,46.497 99.925,63.003 99.925,77.478 99.925,105.918 ; 102.973,2.567 102.973,-7.845 66.397,-7.845 66.397,105.918 102.973,105.918 102.973,77.478 ; 102.973,2.567 102.973,24.659 ; 102.973,24.659 102.973,46.497 ; 102.973,46.497 102.973,63.003 ; 102.973,63.003 102.973,77.478

## Polygon pours and split planes (outlines as drawn)
NetFL1_1 on TopLayer "NETFL1_1_L01_P020" (solid, remove dead copper, pour order 20): 44.25,17.25 44.25,20.75 41.25,23.75 41.25,39.75 44.75,43.25 44.75,48.75 41.25,52.25 41.25,55.75 41.75,56.25 45,56.25 45,62.5 38,62.5 38,17.25
P12V0 on TopLayer "P12V0_L01_P022" (solid, remove dead copper, pour order 22): 45.25,70.25 45.25,81.5 39.75,81.5 39.75,70.25
NetFL1_3 on TopLayer "NETFL1_3_L01_P021" (solid, remove dead copper, pour order 21): 50.75,20.5 50.75,62.5 45,62.5 45,56.25 41.25,56.25 41.25,52 41.25,20.5
GND on TopLayer "GND_L01_P023" (solid, remove dead copper, pour order 23): 51.486,97.25 51.486,3.023 5.58,3.023 0.5,8.103 0.5,97.25
NetFL1_3 on BottomLayer "NETFL1_3_L04_P027" (solid, remove dead copper, pour order 27): 50.75,20.5 50.75,62.5 45,62.5 45,56.25 41.25,56.25 41.25,52 41.25,20.5
NetFL1_1 on BottomLayer "NETFL1_1_L04_P026" (solid, remove dead copper, pour order 26): 44.25,17.25 44.25,20.75 41.25,23.75 41.25,39.75 44.75,43.25 44.75,48.75 41.25,52.25 41.25,56.25 45,56.25 45,62.5 38,62.5 38,17.25
GND on BottomLayer "NONET_L04_P030" (solid, remove dead copper, shelved, pour order 30): 51.486,97.25 51.486,3.023 5.58,3.023 0.5,8.103 0.5,97.25
P3V3 on BottomLayer "P3V3_L04_P028" (solid, remove dead copper, pour order 28): 51.25,97 6.25,97 6.25,91.75 0.25,91.75 0.25,8.25 6.25,8.25 6.25,3.25 51.25,3.25
P12V0 on MidLayer1 "P12V0_L03_P024" (solid, remove dead copper, pour order 24): 51.486,97.25 51.486,3.023 5.58,3.023 0.5,8.103 0.5,97.25
GND on MP(G) (split plane): 51.99,0.51 0.81,0.51 0.81,99.489 51.99,99.489

## Keep-outs
KeepOutLayer:
  lines w0.203: 0,8.103 6.096,8.103 6.096,3.023 51.486,3.023 51.486,97.25 6.096,97.25 6.096,91.923 0,91.923 0,8.103

## Other copper
TopLayer:
  text "Board Layer Stack" at 68.683,79.002 h1.52 r90
  text "Constant" at 68.683,64.527 h1.52 r90
  text "3,5" at 74.779,64.527 h1.52 r90
  text "4,2" at 80.875,64.527 h1.52 r90
  text "4,2" at 86.971,64.527 h1.52 r90
  text "4,2" at 93.067,64.527 h1.52 r90
  text "3,5" at 99.163,64.527 h1.52 r90
  text "Thickness" at 68.683,48.021 h1.52 r90
  text "0,010mm" at 74.779,48.021 h1.52 r90
  text "0,070mm" at 77.827,48.021 h1.52 r90
  text "0,180mm" at 80.875,48.021 h1.52 r90
  text "0,035mm" at 83.923,48.021 h1.52 r90
  text "1,080mm" at 86.971,48.021 h1.52 r90
  text "0,035mm" at 90.019,48.021 h1.52 r90
  text "0,180mm" at 93.067,48.021 h1.52 r90
  text "0,070mm" at 96.115,48.021 h1.52 r90
  text "0,010mm" at 99.163,48.021 h1.52 r90
  text "Material" at 68.683,26.183 h1.52 r90
  text "Solder Resist" at 74.779,26.183 h1.52 r90
  text "Copper" at 77.827,26.183 h1.52 r90
  text "FR-4" at 80.875,26.183 h1.52 r90
  text "Copper" at 83.923,26.183 h1.52 r90
  text "Copper" at 90.019,26.183 h1.52 r90
  text "FR-4" at 93.067,26.183 h1.52 r90
  text "Copper" at 96.115,26.183 h1.52 r90
  text "Solder Resist" at 99.163,26.183 h1.52 r90
  text "Name" at 68.683,4.091 h1.52 r90
  text "TopOverlay" at 71.731,4.091 h1.52 r90
  text "TopSolder" at 74.779,4.091 h1.52 r90
  text "TopLayer" at 77.827,4.091 h1.52 r90
  text "Dielectric1" at 80.875,4.091 h1.52 r90
  text "MP(G)" at 83.923,4.091 h1.52 r90
  text "Dielectric6" at 86.971,4.091 h1.52 r90
  text "MidLayer1" at 90.019,4.091 h1.52 r90
  text "Dielectric2" at 93.067,4.091 h1.52 r90
  text "BottomLayer" at 96.115,4.091 h1.52 r90
  text "BottomSolder" at 99.163,4.091 h1.52 r90
  text "BottomOverlay" at 102.211,4.091 h1.52 r90
  text "Layer" at 68.683,-6.321 h1.52 r90
  text "1" at 71.731,-6.321 h1.52 r90
  text "2" at 74.779,-6.321 h1.52 r90
  text "3" at 77.827,-6.321 h1.52 r90
  text "4" at 80.875,-6.321 h1.52 r90
  text "5" at 83.923,-6.321 h1.52 r90
  text "6" at 86.971,-6.321 h1.52 r90
  text "7" at 90.019,-6.321 h1.52 r90
  text "8" at 93.067,-6.321 h1.52 r90
  text "9" at 96.115,-6.321 h1.52 r90
  text "10" at 99.163,-6.321 h1.52 r90
  text "11" at 102.211,-6.321 h1.52 r90

## Silkscreen, mask and mechanical layers (free items; w line width, h text height)
TopOverlay:
  circle w0.254: c3.556,5.512 r2.857
  circle w0.254: c3.556,94.412 r2.857
  text "EXT8" at 16.75,92.5 h1 r90
  text "EXT9" at 29.75,92.5 h1 r90
  text "EXT11" at 29.75,45.25 h1 r90
  text "EXT10" at 16.75,44.917 h1 r90
Mechanical1:
  lines w0.1: 0.3,0 0.3,18.8 0.3,28.1 0.3,40.26 0.3,49.3 0.3,62.7 0.3,71.8 0.3,83.325 0.3,92.3 0.3,100 52.502,100 52.502,0 0.3,0